# Altium PCB MZCAT_backlight_board_old.PcbDoc
Units mm, origin at the board's own origin, x right, y up, seen from the top; angles counter-clockwise.
Board outline 35.08 x 126.7 mm, 2 copper layers (Top Layer, Bottom Layer); 74 components, 57 nets, 216 pads, 0 vias.
Unrouted connection lines stored in the file: 94.
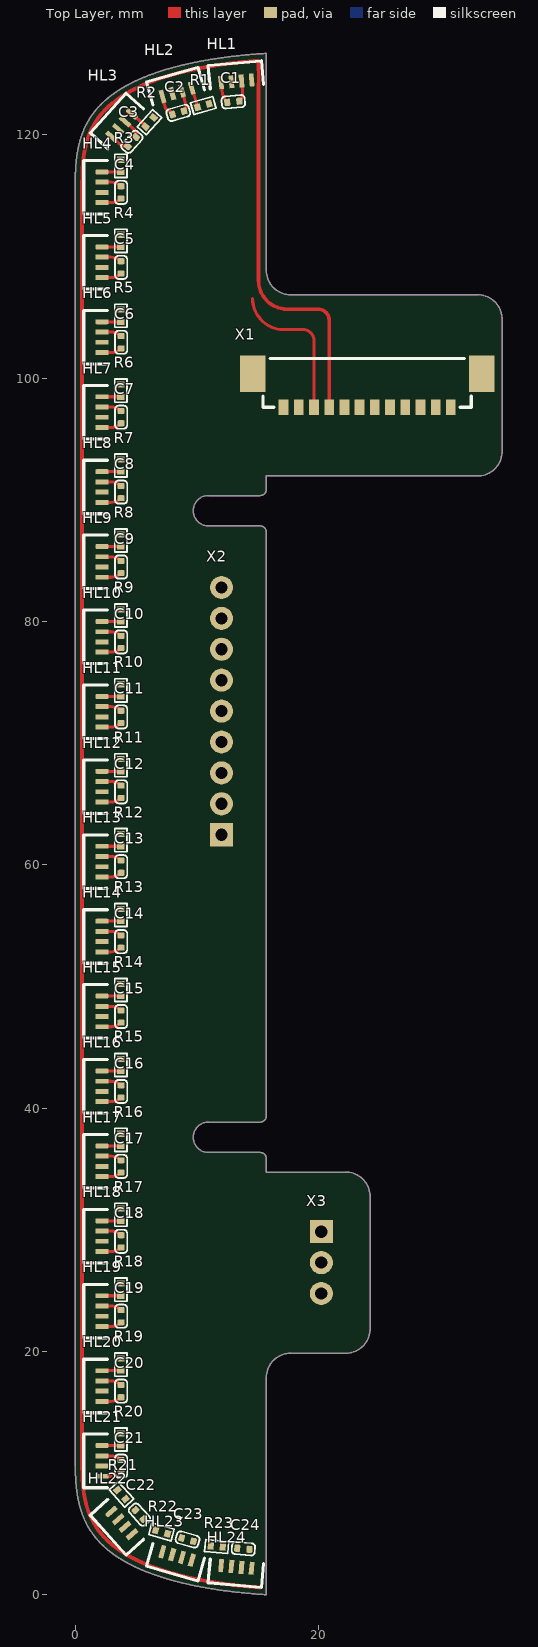
[diagram p0: Top Layer view]
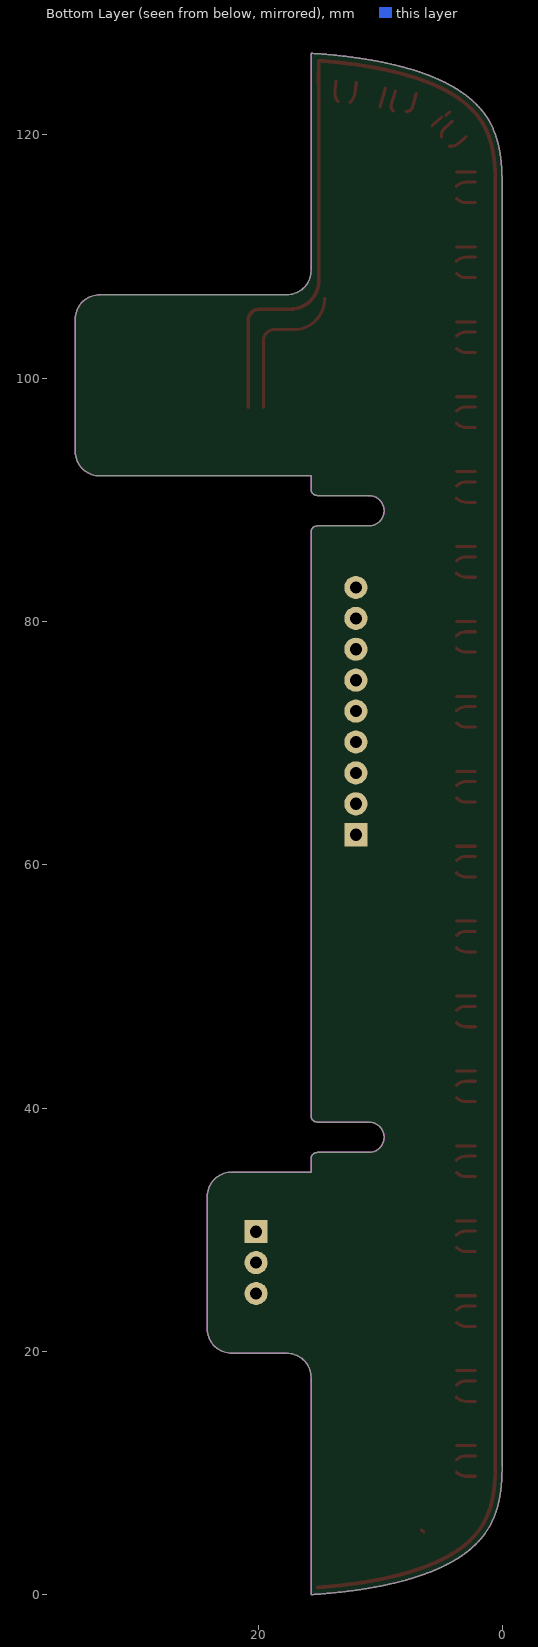
[diagram p1: Bottom Layer view, seen from below]

## Layer stack, top to bottom
Top Solder: solder mask 0.0102, Solder Resist, Dk 3.5
Top Layer: signal copper 0.0356
Dielectric 1: dielectric 0.32, FR-4, Dk 4.8
Bottom Layer: signal copper 0.0356
Bottom Solder: solder mask 0.0102, Solder Resist, Dk 3.5

## Board outline
676 vertices, not listed, extent 0.006,0.006 35.086,126.702

## Design rules (kind name [scope] priority, off if disabled: settings)
AcuteAngle min_acute_angle [OnCopper] p1: minimum=3.50000000000000E+0001 checktracksonly=FALSE // Минимальный угол между примитивами топологии
BoardOutlineClearance board_outline_clearance_std [NOT (OnLayer('Bottom Overlay') OR OnLayer('Top Overlay'))] p1: gap=0.25 ignorepadtopadclearanceinfootprint=FALSE except(0: Arc-SplitContinuation Track-SplitContinuation SMDPad-SplitContinuation THPad-SplitContinuation Via-SplitContinuation Fill-SplitContinuation Poly-SplitContinuation Region-SplitContinuation Text-SplitContinuation) // Отступ элементов топологии от края фрезеруемой печатной платы
Clearance Clearance_keepout [OnTopLayer OR OnBottomLayer vs OnLayer('Keep-Out Layer')] p1: gap=0.125 ignorepadtopadclearanceinfootprint=FALSE except(0.2: Arc-Fill Arc-Poly Track-Fill Track-Poly SMDPad-SMDPad SMDPad-Fill SMDPad-Poly THPad-Fill THPad-Poly Via-Fill Via-Poly Fill-Fill Fill-Poly Poly-Poly Poly-Region Poly-Text; 0.25: Arc-Hole Track-Hole SMDPad-Hole THPad-Hole Via-Hole Fill-Hole Poly-Hole Region-Hole Text-Hole; 0.4: Arc-Track Track-Track)
Clearance TOP_BOT_GND [InPolygonClass('TOP_BOT')] p2: gap=0.5 ignorepadtopadclearanceinfootprint=FALSE
Clearance REF_GND [InPolygonClass('REF_GND')] p3: gap=0.5 ignorepadtopadclearanceinfootprint=FALSE
Clearance clearance_outer_18um_std [OnTopLayer OR OnBottomLayer] p4: gap=0.125 ignorepadtopadclearanceinfootprint=FALSE except(0.2: Arc-Fill Arc-Poly Track-Fill Track-Poly SMDPad-Fill SMDPad-Poly THPad-Fill THPad-Poly Via-Fill Via-Poly Fill-Fill Fill-Poly Poly-Poly Poly-Region Poly-Text; 0.25: Arc-Hole Track-Hole THPad-Hole Via-Hole Fill-Hole Poly-Hole Region-Hole Text-Hole) // Зазоры на внешних слоях
Clearance clearance_inner_18um_std [NOT (OnTopLayer Or OnBottomLayer)] p5: gap=0.125 ignorepadtopadclearanceinfootprint=FALSE except(0.2: Arc-Fill Arc-Poly Track-Fill Track-Poly SMDPad-SMDPad SMDPad-Fill SMDPad-Poly THPad-Fill THPad-Poly Via-Fill Via-Poly Fill-Fill Fill-Poly Poly-Poly Poly-Region Poly-Text; 0.25: Arc-Hole Track-Hole SMDPad-Hole THPad-Hole Via-Hole Fill-Hole Poly-Hole Region-Hole Text-Hole) // Зазоры на внутренних слоях
ComponentClearance [All] p1: gap=0 collisioncheckmode=3 verticalgap=0 showdistances=FALSE
DiffPairsRouting "Schematic Differential Pairs Routing" [InNetClass('EHTERNET')] p1: maxlimit=0.3 minlimit=0.3 mostfreqgap=0.3 toplayer_minwidth=0.173 toplayer_maxwidth=0.173 toplayer_prefwidth=0.173 bottomlayer_minwidth=0.173 bottomlayer_maxwidth=0.173 bottomlayer_prefwidth=0.173 impedanceprofiledriven=TRUE impedanceprofileid={FFC83A3E-07CF-4B17-BD82-38FFC45B4F6C} maxuncoupledlength=12.7
DiffPairsRouting "Schematic Differential Pairs Routing_5" [InNetClass('MIPI_CSI_0')] p2: maxlimit=0.3 minlimit=0.3 mostfreqgap=0.3 toplayer_minwidth=0.173 toplayer_maxwidth=0.173 toplayer_prefwidth=0.173 bottomlayer_minwidth=0.173 bottomlayer_maxwidth=0.173 bottomlayer_prefwidth=0.173 impedanceprofiledriven=TRUE impedanceprofileid={FFC83A3E-07CF-4B17-BD82-38FFC45B4F6C} maxuncoupledlength=12.7
DiffPairsRouting "Schematic Differential Pairs Routing_4" [InNetClass('MIPI_CSI_1')] p3: maxlimit=0.3 minlimit=0.3 mostfreqgap=0.3 toplayer_minwidth=0.173 toplayer_maxwidth=0.173 toplayer_prefwidth=0.173 bottomlayer_minwidth=0.173 bottomlayer_maxwidth=0.173 bottomlayer_prefwidth=0.173 impedanceprofiledriven=TRUE impedanceprofileid={FFC83A3E-07CF-4B17-BD82-38FFC45B4F6C} maxuncoupledlength=12.7
DiffPairsRouting diff_pairs_routing [All] p4: maxlimit=0.127 minlimit=0.127 mostfreqgap=0.127 toplayer_minwidth=0.143 toplayer_maxwidth=0.143 toplayer_prefwidth=0.143 bottomlayer_minwidth=0.143 bottomlayer_maxwidth=0.143 bottomlayer_prefwidth=0.143 impedanceprofiledriven=TRUE maxuncoupledlength=12.7 // Правила трассировки дифференциальных пар
HoleSize min_hole_size_std [IsPad] p1: absolutevalues=TRUE maxlimit=5.9 minlimit=0.5 maxpercent=80.000 minpercent=20.000 // Диаметр межслойного переходного отверстия
HoleSize min_hole_size_via_std [IsVia] p2: absolutevalues=TRUE maxlimit=5.9 minlimit=0.3 maxpercent=80.000 minpercent=20.000 // Минимальный диаметр монтажного отверстия
HoleToHoleClearance hole_to_hole_clearance_std [All] p1: gap=0.2 allowstackedmicrovias=FALSE // Минимальное расстояние между краями двух отверстий
Length "Schematic Length Constraint" [InNetClass('EHTERNET')] p1: maxlimit=150 minlimit=0
Length "Schematic Length Constraint_5" [InNetClass('MIPI_CSI_0')] p2: maxlimit=150 minlimit=0
Length "Schematic Length Constraint_4" [InNetClass('MIPI_CSI_1')] p3: maxlimit=150 minlimit=0
MatchedLengths "Schematic Matched Net Lengths_1" [InNetClass('EHTERNET')] p1: tolerance=50 checknetsindiffpair=FALSE checkdiffpairvsdiffpair=TRUE checkxsignals=TRUE checkothers=TRUE
MatchedLengths "Schematic Matched Net Lengths" [InNetClass('EHTERNET')] p2: tolerance=0.15 checknetsindiffpair=TRUE checkdiffpairvsdiffpair=FALSE checkxsignals=FALSE checkothers=FALSE
MatchedLengths "Schematic Matched Net Lengths_11" [InNetClass('MIPI_CSI_0')] p3: tolerance=1.5 checknetsindiffpair=FALSE checkdiffpairvsdiffpair=TRUE checkxsignals=TRUE checkothers=TRUE
MatchedLengths "Schematic Matched Net Lengths_10" [InNetClass('MIPI_CSI_1')] p4: tolerance=1.5 checknetsindiffpair=FALSE checkdiffpairvsdiffpair=TRUE checkxsignals=TRUE checkothers=TRUE
MatchedLengths "Schematic Matched Net Lengths_9" [InNetClass('MIPI_CSI_1')] p5: tolerance=0.15 checknetsindiffpair=TRUE checkdiffpairvsdiffpair=FALSE checkxsignals=FALSE checkothers=FALSE
MatchedLengths "Schematic Matched Net Lengths_8" [InNetClass('MIPI_CSI_0')] p6: tolerance=0.15 checknetsindiffpair=TRUE checkdiffpairvsdiffpair=FALSE checkxsignals=FALSE checkothers=FALSE
MinimumAnnularRing min_via_ar_std [All] p1: minimumring=0.15 // Поясок площадки переходного отверстия (Annular ring VIA)
MinimumAnnularRing min_pad_ar_std [All] p2: minimumring=0.2 // Поясок монтажной контактной площадки (Annular ring PAD)
MinimumSolderMaskSliver min_solder_mask_bridge_std [All] p1: minsoldermaskwidth=0 // Мнимальная ширина масочного мостика
PlaneClearance plane_clearance_18um_std [All] p1: clearance=0.2 // Отступ полигона (для слоя plane) от элементов топологии
PlaneConnect [All] p1: planeconnectstyle=Relief reliefexpansion=0.5 reliefentries=4 reliefconductorwidth=0.2 reliefairgap=0.2
PolygonConnect poly_connect_to_pad<=0.3 [(AsMM(PadXSize_AllLayers)<=0.301) or (AsMM(PadYSize_AllLayers)<=0.301)] p1: thpad.connectstyle=Relief thpad.reliefconductorwidth=0.2 thpad.reliefentries=4 thpad.polygonreliefangle="90 Angle" thpad.airgapwidth=0.2 smdpad.connectstyle=Relief smdpad.reliefconductorwidth=0.2 smdpad.reliefentries=4 smdpad.polygonreliefangle="90 Angle" smdpad.airgapwidth=0.2 via.connectstyle=Direct via.reliefconductorwidth=0.254 via.reliefentries=4 via.polygonreliefangle="90 Angle" via.airgapwidth=0.254 // Правила подключения полигонов для падов от 0,3мм и меньше
PolygonConnect poly_connect_to_pad<=0.4 [(AsMM(PadXSize_AllLayers)<=0.401) or (AsMM(PadYSize_AllLayers)<=0.401)] p2: thpad.connectstyle=Relief thpad.reliefconductorwidth=0.26 thpad.reliefentries=4 thpad.polygonreliefangle="90 Angle" thpad.airgapwidth=0.2 smdpad.connectstyle=Relief smdpad.reliefconductorwidth=0.26 smdpad.reliefentries=4 smdpad.polygonreliefangle="90 Angle" smdpad.airgapwidth=0.2 via.connectstyle=Direct via.reliefconductorwidth=0.254 via.reliefentries=4 via.polygonreliefangle="90 Angle" via.airgapwidth=0.254 // Правила подключения полигонов для падов от 0,4 и меньше
PolygonConnect poly_connect_to_pad<=0.6 [(AsMM(PadXSize_AllLayers)<=0.601) or (AsMM(PadYSize_AllLayers)<=0.601)] p3: thpad.connectstyle=Relief thpad.reliefconductorwidth=0.33 thpad.reliefentries=4 thpad.polygonreliefangle="90 Angle" thpad.airgapwidth=0.2 smdpad.connectstyle=Relief smdpad.reliefconductorwidth=0.33 smdpad.reliefentries=4 smdpad.polygonreliefangle="90 Angle" smdpad.airgapwidth=0.2 via.connectstyle=Direct via.reliefconductorwidth=0.254 via.reliefentries=4 via.polygonreliefangle="90 Angle" via.airgapwidth=0.254 // Правила подключения полигонов для падов от 0,6мм и меньше
PolygonConnect poly_connect_to_pad<=0.7 [(AsMM(PadXSize_AllLayers)<=0.701) or (AsMM(PadYSize_AllLayers)<=0.701)] p4: thpad.connectstyle=Relief thpad.reliefconductorwidth=0.46 thpad.reliefentries=4 thpad.polygonreliefangle="90 Angle" thpad.airgapwidth=0.2 smdpad.connectstyle=Relief smdpad.reliefconductorwidth=0.46 smdpad.reliefentries=4 smdpad.polygonreliefangle="90 Angle" smdpad.airgapwidth=0.2 via.connectstyle=Direct via.reliefconductorwidth=0.254 via.reliefentries=4 via.polygonreliefangle="90 Angle" via.airgapwidth=0.254 // Правила подключения полигонов для падов от 0,7мм и меньше
PolygonConnect poly_connect_to_pad<=0.8 [(AsMM(PadXSize_AllLayers)<=0.8)or(AsMM(PadYSize_AllLayers)<=0.8)] p5: thpad.connectstyle=Relief thpad.reliefconductorwidth=0.53 thpad.reliefentries=4 thpad.polygonreliefangle="90 Angle" thpad.airgapwidth=0.3 smdpad.connectstyle=Relief smdpad.reliefconductorwidth=0.53 smdpad.reliefentries=4 smdpad.polygonreliefangle="90 Angle" smdpad.airgapwidth=0.2 via.connectstyle=Direct via.reliefconductorwidth=0.254 via.reliefentries=4 via.polygonreliefangle="90 Angle" via.airgapwidth=0.254 // Правила подключения полигонов для падов от 0,8мм и меньше
PolygonConnect poly_connect_to_pad<=1 [(AsMM(PadXSize_AllLayers)<=1.01)or(AsMM(PadYSize_AllLayers)<=1.01)] p6: thpad.connectstyle=Relief thpad.reliefconductorwidth=0.6 thpad.reliefentries=4 thpad.polygonreliefangle="90 Angle" thpad.airgapwidth=0.3 smdpad.connectstyle=Relief smdpad.reliefconductorwidth=0.6 smdpad.reliefentries=4 smdpad.polygonreliefangle="90 Angle" smdpad.airgapwidth=0.2 via.connectstyle=Direct via.reliefconductorwidth=0.254 via.reliefentries=4 via.polygonreliefangle="90 Angle" via.airgapwidth=0.254 // Правила подключения полигонов для падов от 1мм и меньше
PolygonConnect poly_connect_to_pad<=1.3 [(AsMM(PadXSize_AllLayers)<=1.31)or(AsMM(PadYSize_AllLayers)<=1.31)] p7: thpad.connectstyle=Relief thpad.reliefconductorwidth=0.66 thpad.reliefentries=4 thpad.polygonreliefangle="90 Angle" thpad.airgapwidth=0.3 smdpad.connectstyle=Relief smdpad.reliefconductorwidth=0.86 smdpad.reliefentries=4 smdpad.polygonreliefangle="90 Angle" smdpad.airgapwidth=0.2 via.connectstyle=Direct via.reliefconductorwidth=0.254 via.reliefentries=4 via.polygonreliefangle="90 Angle" via.airgapwidth=0.254 // Правила подключения полигонов для падов от 1,3мм и меньше
PolygonConnect poly_connect_to_pad<=1.6 [(AsMM(PadXSize_AllLayers)<=1.61)or(AsMM(PadYSize_AllLayers)<=1.61)] p8: thpad.connectstyle=Relief thpad.reliefconductorwidth=0.8 thpad.reliefentries=4 thpad.polygonreliefangle="90 Angle" thpad.airgapwidth=0.3 smdpad.connectstyle=Relief smdpad.reliefconductorwidth=1 smdpad.reliefentries=4 smdpad.polygonreliefangle="90 Angle" smdpad.airgapwidth=0.2 via.connectstyle=Direct via.reliefconductorwidth=0.254 via.reliefentries=4 via.polygonreliefangle="90 Angle" via.airgapwidth=0.254 // Правила подключения полигонов для падов от 1,6мм и меньше
PolygonConnect poly_connect_to_pad<=1.8 [(AsMM(PadXSize_AllLayers)<=1.8)or(AsMM(PadYSize_AllLayers)<=1.8)] p9: thpad.connectstyle=Relief thpad.reliefconductorwidth=1 thpad.reliefentries=4 thpad.polygonreliefangle="90 Angle" thpad.airgapwidth=0.3 smdpad.connectstyle=Relief smdpad.reliefconductorwidth=1.2 smdpad.reliefentries=4 smdpad.polygonreliefangle="90 Angle" smdpad.airgapwidth=0.2 via.connectstyle=Direct via.reliefconductorwidth=0.254 via.reliefentries=4 via.polygonreliefangle="90 Angle" via.airgapwidth=0.254 // Правила подключения полигонов для падов от 1,8мм и меньше
PolygonConnect poly_connect_to_pad<=2 [(AsMM(PadXSize_AllLayers)<=2.01)or(AsMM(PadYSize_AllLayers)<=2.01)] p10: thpad.connectstyle=Relief thpad.reliefconductorwidth=1.1 thpad.reliefentries=4 thpad.polygonreliefangle="90 Angle" thpad.airgapwidth=0.3 smdpad.connectstyle=Relief smdpad.reliefconductorwidth=1.4 smdpad.reliefentries=4 smdpad.polygonreliefangle="90 Angle" smdpad.airgapwidth=0.2 via.connectstyle=Direct via.reliefconductorwidth=0.254 via.reliefentries=4 via.polygonreliefangle="90 Angle" via.airgapwidth=0.254 // Правила подключения полигонов для падов от 2мм и меньше
PolygonConnect poly_connect_to_pad<=2.3 [(AsMM(PadXSize_AllLayers)<=2.31)or(AsMM(PadYSize_AllLayers)<=2.31)] p11: thpad.connectstyle=Relief thpad.reliefconductorwidth=1.2 thpad.reliefentries=4 thpad.polygonreliefangle="90 Angle" thpad.airgapwidth=0.3 smdpad.connectstyle=Relief smdpad.reliefconductorwidth=1.4 smdpad.reliefentries=4 smdpad.polygonreliefangle="90 Angle" smdpad.airgapwidth=0.2 via.connectstyle=Direct via.reliefconductorwidth=0.254 via.reliefentries=4 via.polygonreliefangle="90 Angle" via.airgapwidth=0.254 // Правила подключения полигонов для падов от 2,3мм и меньше
PolygonConnect poly_connect_to_pad<=2.5 [(AsMM(PadXSize_AllLayers)<=2.51)or(AsMM(PadYSize_AllLayers)<=2.51)] p12: thpad.connectstyle=Relief thpad.reliefconductorwidth=1.2 thpad.reliefentries=4 thpad.polygonreliefangle="90 Angle" thpad.airgapwidth=0.3 smdpad.connectstyle=Relief smdpad.reliefconductorwidth=1.4 smdpad.reliefentries=4 smdpad.polygonreliefangle="90 Angle" smdpad.airgapwidth=0.2 via.connectstyle=Direct via.reliefconductorwidth=0.254 via.reliefentries=4 via.polygonreliefangle="90 Angle" via.airgapwidth=0.254 // Правила подключения полигонов для падов от 2,5мм и меньше
PolygonConnect poly_connect_to_pad<=2.7 [(AsMM(PadXSize_AllLayers)<=2.71)or(AsMM(PadYSize_AllLayers)<=2.71)] p13: thpad.connectstyle=Relief thpad.reliefconductorwidth=1.4 thpad.reliefentries=4 thpad.polygonreliefangle="90 Angle" thpad.airgapwidth=0.3 smdpad.connectstyle=Relief smdpad.reliefconductorwidth=1.6 smdpad.reliefentries=4 smdpad.polygonreliefangle="90 Angle" smdpad.airgapwidth=0.2 via.connectstyle=Direct via.reliefconductorwidth=0.254 via.reliefentries=4 via.polygonreliefangle="90 Angle" via.airgapwidth=0.254 // Правила подключения полигонов для падов от 2,7мм и меньше
PolygonConnect poly_connect_to_pad<=3 [(AsMM(PadXSize_AllLayers)<=3.01)or(AsMM(PadYSize_AllLayers)<=3.01)] p14: thpad.connectstyle=Relief thpad.reliefconductorwidth=1.6 thpad.reliefentries=4 thpad.polygonreliefangle="90 Angle" thpad.airgapwidth=0.3 smdpad.connectstyle=Relief smdpad.reliefconductorwidth=1.8 smdpad.reliefentries=4 smdpad.polygonreliefangle="90 Angle" smdpad.airgapwidth=0.2 via.connectstyle=Direct via.reliefconductorwidth=0.254 via.reliefentries=4 via.polygonreliefangle="90 Angle" via.airgapwidth=0.254 // Правила подключения полигонов для падов от 3мм и меньше
PolygonConnect poly_connect_to_pad<=7 [(AsMM(PadXSize_AllLayers)<7.01)or(AsMM(PadYSize_AllLayers)<=7.01)] p15: thpad.connectstyle=Relief thpad.reliefconductorwidth=2 thpad.reliefentries=4 thpad.polygonreliefangle="90 Angle" thpad.airgapwidth=0.4 smdpad.connectstyle=Relief smdpad.reliefconductorwidth=2 smdpad.reliefentries=4 smdpad.polygonreliefangle="90 Angle" smdpad.airgapwidth=0.3 via.connectstyle=Direct via.reliefconductorwidth=0.254 via.reliefentries=4 via.polygonreliefangle="90 Angle" via.airgapwidth=0.254 // Правила подключения полигонов для падов от 7мм и меньше
PolygonConnect poly_connect_to_pad [All] p16: thpad.connectstyle=Relief thpad.reliefconductorwidth=0.25 thpad.reliefentries=4 thpad.polygonreliefangle="90 Angle" thpad.airgapwidth=0.2 smdpad.connectstyle=Relief smdpad.reliefconductorwidth=0.25 smdpad.reliefentries=4 smdpad.polygonreliefangle="90 Angle" smdpad.airgapwidth=0.2 via.connectstyle=Direct via.reliefconductorwidth=0.25 via.reliefentries=4 via.polygonreliefangle="90 Angle" via.airgapwidth=0.2 // Правила подключения полигонов общие
RoutingCorners [All] p1 off: cornerstyle=45-Degree minsetback=2.5 maxsetback=2.5
RoutingVias [All] p1: holewidth=0.3 width=0.6 viastyle="Through Hole" minholewidth=0.3 minwidth=0.6 maxholewidth=5.9 maxwidth=6.4
SilkToSilkClearance silk_to_silk_clearance_std [All] p1 off: silktosilkclearance=0.15 // Отступ текста шелкографии от других примитивов шелкографии
SilkToSolderMaskClearance silk_to_solder_mask_clearance_std [IsPad] p1 off: minsilkscreentomaskgap=0.15 clearancetoexposedcopper=FALSE // Минимальное расстояние между элементами шелкографии и вскрытой медью
SolderMaskExpansion solder_mask_expansion_std [All] p1: expansion=0.05 istentingtop=FALSE // Припуск паяльной масски
UnRoutedNet [All] p1: checkbadconnections=TRUE
Width width_18um_std [All] p1: maxlimit=10 minlimit=0.125 preferedwidth=0.15 checkconnectedcopper=TRUE // Ширина проводников (общая)
19 further rules are at their usual default settings.

## Classes and differential pairs
component class MZCAT_backlight_board: HL HL1 HL3 HL5 HL6 HL7 HL9 HL11 HL13 HL15 HL17 HL21 HL23 R1 R2 R3 R4 R5 R6 R7 R8 R9 R10 R11 R12 R13 R14 R15 R16 R17 R18 R19 R20 R21 R22 R23 X1 X2 X3 С1 С2 С3 С4 С5 С6 С7 С8 С9 С10 С11 С12 С13 С14 С15 С16 С17 С18 С19 С20 С21 С22 С23 С24

## Components (designator, comment, footprint, x,y, rotation, side; value= is the part's Value field where it differs from the comment)
HL1 "WS2812B" "ws2812b 4020" 13.25,124.4 r275 top
HL2 "WS2812B" "ws2812b 4020" 8.375,123.5 r286 top
HL3 "WS2812B" "ws2812b 4020" 3.819,120.788 r318 top
HL4 "WS2812B" "ws2812b 4020" 2.2,115.692 r0 top
HL5 "WS2812B" "ws2812b 4020" 2.2,109.528 r0 top
HL6 "WS2812B" "ws2812b 4020" 2.2,103.37 r0 top
HL7 "WS2812B" "ws2812b 4020" 2.2,97.212 r0 top
HL8 "WS2812B" "ws2812b 4020" 2.2,91.054 r0 top
HL9 "WS2812B" "ws2812b 4020" 2.2,84.896 r0 top
HL10 "WS2812B" "ws2812b 4020" 2.2,78.738 r0 top
HL11 "WS2812B" "ws2812b 4020" 2.2,72.58 r0 top
HL12 "WS2812B" "ws2812b 4020" 2.2,66.422 r0 top
HL13 "WS2812B" "ws2812b 4020" 2.2,60.264 r0 top
HL14 "WS2812B" "ws2812b 4020" 2.2,54.106 r0 top
HL15 "WS2812B" "ws2812b 4020" 2.2,47.948 r0 top
HL16 "WS2812B" "ws2812b 4020" 2.2,41.79 r0 top
HL17 "WS2812B" "ws2812b 4020" 2.2,35.632 r0 top
HL18 "WS2812B" "ws2812b 4020" 2.2,29.474 r0 top
HL19 "WS2812B" "ws2812b 4020" 2.2,23.316 r0 top
HL20 "WS2812B" "ws2812b 4020" 2.2,17.158 r0 top
HL21 "WS2812B" "ws2812b 4020" 2.2,11 r0 top
HL22 "WS2812B" "ws2812b 4020" 3.819,5.904 r42 top
HL23 "WS2812B" "ws2812b 4020" 8.375,3.192 r74 top
HL24 "WS2812B" "ws2812b 4020" 13.25,2.292 r85 top
R1 "100" R0402 10.531,122.413 r16 top
R2 "100" R0402 6.109,121.041 r48 top
R3 "100" R0402 3.75,117.452 r90 top
R4 "100" R0402 3.75,111.288 r90 top
R5 "100" R0402 3.75,105.13 r90 top
R6 "100" R0402 3.75,98.972 r90 top
R7 "100" R0402 3.75,92.814 r90 top
R8 "100" R0402 3.75,86.656 r90 top
R9 "100" R0402 3.75,80.498 r90 top
R10 "100" R0402 3.75,74.34 r90 top
R11 "100" R0402 3.75,68.182 r90 top
R12 "100" R0402 3.75,62.024 r90 top
R13 "100" R0402 3.75,55.866 r90 top
R14 "100" R0402 3.75,49.708 r90 top
R15 "100" R0402 3.75,43.55 r90 top
R16 "100" R0402 3.75,37.392 r90 top
R17 "100" R0402 3.75,31.234 r90 top
R18 "100" R0402 3.75,25.076 r90 top
R19 "100" R0402 3.75,18.918 r90 top
R20 "100" R0402 3.75,12.76 r90 top
R21 "100" R0402 3.8,8.25 r132 top
R22 "100" R0402 7.094,5.163 r164 top
R23 "100" R0402 11.627,3.969 r175 top
X1 "PicoBlade-12" "PicoBlade-12 SMD" 24,97.611 r180 top
X2 "PLS 1 x 9" "PLS_1x9 - emty" 12.025,62.475 r180 top
X3 "PLS 1 x 3" "PLS_1x3 - emty" 20.228,24.765 r180 top
С1 "0,1мк" C0402 12.498,122.695 r5 top
С2 "0,1мк" C0402 7.983,121.694 r16 top
С3 "0,1мк" C0402 4.304,119.076 r48 top
С4 "0,1мк" C0402 3.75,114.772 r90 top
С5 "0,1мк" C0402 3.75,108.608 r90 top
С6 "0,1мк" C0402 3.75,102.45 r90 top
С7 "0,1мк" C0402 3.75,96.292 r90 top
С8 "0,1мк" C0402 3.75,90.134 r90 top
С9 "0,1мк" C0402 3.75,83.976 r90 top
С10 "0,1мк" C0402 3.75,77.818 r90 top
С11 "0,1мк" C0402 3.75,71.66 r90 top
С12 "0,1мк" C0402 3.75,65.502 r90 top
С13 "0,1мк" C0402 3.75,59.344 r90 top
С14 "0,1мк" C0402 3.75,53.186 r90 top
С15 "0,1мк" C0402 3.75,47.028 r90 top
С16 "0,1мк" C0402 3.75,40.87 r90 top
С17 "0,1мк" C0402 3.75,34.712 r90 top
С18 "0,1мк" C0402 3.75,28.554 r90 top
С19 "0,1мк" C0402 3.75,22.396 r90 top
С20 "0,1мк" C0402 3.75,16.238 r90 top
С21 "0,1мк" C0402 3.75,10.08 r90 top
С22 "0,1мк" C0402 5.6,6.2 r132 top
С23 "0,1мк" C0402 9.706,4.38 r164 top
С24 "0,1мк" C0402 14.319,3.718 r175 top

## Footprints (in the part's own frame and the unit in brackets; to place one, negate y for a bottom-side part, rotate by r counter-clockwise, add the part's x,y. Pads: shape width x height; smd on the part's side, far side on the other; paste and mask are expansions set on the pad)
C0402 [mm]
  rrect50% 0.5x0.6 smd: 1(0,-0.02) 2(1,-0.02)
  silkscreen extent -0.45,-0.53 1.45,0.48, body extent 0,-0.28 1,0.22, height 0.5
"PicoBlade-12 SMD" [mm]
  rect 2.1x3 smd: 0(-9.425,-2.75) 0(9.425,-2.75)
  rect 0.8x1.3 smd: 1(6.875,0) 2(5.625,0) 3(4.375,0) 4(3.125,0) 5(1.875,0) 6(0.625,0) 7(-0.625,0) 8(-1.875,0) 9(-3.125,0) 10(-4.375,0) 11(-5.625,0) 12(-6.875,0)
  silkscreen extent -8.55,-4 8.55,0, body extent -10.07,-3.85 10.07,0.35, height 4.72
"PLS_1x3 - emty" [mm]
  round 1.9 hole 1: 1(0,0) 2(0,-2.54)
  rect 1.9x1.9 hole 1: 3(0,-5.08)
"PLS_1x9 - emty" [mm]
  rect 1.9x1.9 hole 1: 1(0,0)
  round 1.9 hole 1: 2(0,-2.54) 3(0,-5.08) 4(0,-7.62) 5(0,-10.16) 6(0,-12.7) 7(0,-15.24) 8(0,-17.78) 9(0,-20.32)
R0402 [mm]
  rect 0.5x0.6 smd: 1(-0.5,0) 2(0.5,0)
  silkscreen extent -0.95,-0.5 0.95,0.5, body extent -0.5,-0.23 0.5,0.28, height 0.36
"ws2812b 4020" [mm] "ws2812b led in 4020 case"
  rrect50% 1.09x0.4 smd: 1(0,1.26)
  rect 1.09x0.4 smd: 2(0,0.42) 3(0,-0.42) 4(0,-1.26)
  silkscreen extent -1.5,-2.2 0.45,2.2, body extent -1.3,-2 0.45,2, height 2

## Part data
HL1 HL2 HL3 HL4 HL5 HL6 HL7 HL8 HL9 HL10 HL11 HL12 HL13 HL14 HL15 HL16 HL17 HL18 HL19 HL20 HL21 HL22 HL23 HL24: "адресный светодиод на микросхеме WS2812b", Name=WS2812B
R1 R2 R3 R4 R5 R6 R7 R8 R9 R10 R11 R12 R13 R14 R15 R16 R17 R18 R19 R20 R21 R22 R23: library part "Резистор 0.05Вт", "Резистор 0,05Вт"
X1: library part Header_12, "Разъем - 12 конт. мама", Contact_1=+7,2В, Contact_2=SERVO_DATA, Contact_3=LED_DATA, Contact_4=+5В, Contact_5=DN, Contact_6=DP, Contact_7=SSRXN, Contact_8=SSRXP, Contact_9=SSTXN, Contact_10=SSTXP, Contact_11=GND, Contact_12=GND, Contact_13=TP, Name=PicoBlade-12
С1 С2 С3 С4 С5 С6 С7 С8 С9 С10 С11 С12 С13 С14 С15 С16 С17 С18 С19 С20 С21 С22 С23 С24: library part "Кер. конденсатор"
X2: Contact_1=+5В, Contact_2=DN, Contact_3=DP, Contact_4=GND, Contact_5=SSRXN, Contact_6=SSRXP, Contact_7=GND, Contact_8=SSTXN, Contact_9=SSTXP, Name="PLS 1 x 9"
X3: Contact_1=VDD, Contact_2=GND, Contact_3=DATA, Name="PLS 1 x 3"

## Nets (pads, with @x,y where several pads share a name; then routed paths per layer and width w, separated by ;. In a path a pad name is that pad's centre, name@x,y a point inside that pad or via, vN(x,y) a via of type N, cw(c..) or ccw(c..) an arc to the next point about the centre after c; other vN are vias at no path point)
+5В: HL1.2 HL2.2 HL3.2 HL4.2 HL5.2 HL6.2 HL7.2 HL8.2 HL9.2 HL10.2 HL11.2 HL12.2 HL13.2 HL14.2 HL15.2 HL16.2 HL17.2 HL18.2 HL19.2 HL20.2 HL21.2 HL22.2 HL23.2 HL24.2 X1.4 X2.1 С1.2 С2.2 С3.2 С4.2 С5.2 С6.2 С7.2 С8.2 С9.2 С10.2 С11.2 С12.2 С13.2 С14.2 С15.2 С16.2 С17.2 С18.2 С19.2 С20.2 С21.2 С22.2 С23.2 С24.2 | length 213.7
  Top Layer w0.254: HL21.2 2.949,11.42 cw(c2.949,10.259) С21.2 ; HL20.2 2.949,17.578 cw(c2.949,16.418) С20.2 ; HL19.2 2.949,23.736 cw(c2.949,22.576) С19.2 ; HL18.2 2.949,29.894 cw(c2.949,28.734) С18.2 ; HL17.2 2.949,36.052 cw(c2.949,34.892) С17.2 ; HL16.2 2.949,42.21 cw(c2.949,41.05) С16.2 ; HL15.2 2.949,48.368 cw(c2.949,47.208) С15.2 ; HL14.2 2.949,54.526 cw(c2.949,53.366) С14.2 ; HL13.2 2.949,60.684 cw(c2.949,59.524) С13.2 ; HL12.2 2.949,66.842 cw(c2.949,65.682) С12.2 ; HL11.2 2.949,73 cw(c2.949,71.84) С11.2 ; HL10.2 2.949,79.158 cw(c2.949,77.998) С10.2 ; HL9.2 2.949,85.316 cw(c2.949,84.156) С9.2 ; HL8.2 2.949,91.474 cw(c2.949,90.314) С8.2 ; HL7.2 2.949,97.632 cw(c2.949,96.472) С7.2 ; HL6.2 2.949,103.79 cw(c2.949,102.63) С6.2 ; HL5.2 2.949,109.948 cw(c2.949,108.788) С5.2 ; HL4.2 2.949,116.112 cw(c2.949,114.951) С4.2 ; HL3.2 4.418,120.829 4.765,120.517 cw(c4.595,120.328) 4.777,120.505 cw(c4.24,119.984) 4.988,119.984 С3.2 ; HL2.2 8.894,123.214 9.122,122.419 cw(c8.878,122.349) 9.131,122.328 cw(c8.545,122.376) 9.045,122.066 С2.2 ; С1.2 ccw(c12.883,123.375) 13.75,123.375 13.75,123.612 ccw(c13.496,123.612) 13.749,123.634 13.715,124.021 HL1.2
  Top Layer w0.3: 0.575,9.888 ccw(c0.875,9.888) 0.575,9.878 0.576,9.855 0.577,9.82 0.579,9.786 ; 0.625,117.612 cw(c0.925,117.612) 0.626,117.64 0.627,117.649 ; 0.775,118.704 0.767,118.66 0.759,118.616 0.752,118.579 0.745,118.541 0.739,118.504 0.732,118.466 0.726,118.429 0.72,118.391 0.714,118.353 0.708,118.315 0.702,118.276 0.697,118.238 0.691,118.199 0.686,118.16 0.681,118.123 ccw(c0.978,118.081) 0.68,118.121 0.675,118.082 0.67,118.043 0.665,118.003 0.66,117.963 0.656,117.924 0.651,117.884 0.648,117.852 0.644,117.819 0.641,117.787 0.637,117.755 0.634,117.722 0.631,117.69 0.627,117.649 ; 0.775,118.705 0.784,118.747 cw(c1.078,118.689) 0.784,118.749 0.792,118.791 cw(c1.087,118.731) 0.793,118.794 ; 0.793,118.794 0.802,118.835 0.811,118.878 0.82,118.92 ; 0.82,118.922 0.83,118.964 0.839,119.006 0.849,119.048 ; 0.849,119.049 0.859,119.09 0.869,119.132 0.88,119.174 0.89,119.214 0.901,119.256 0.912,119.296 ; 0.912,119.297 0.923,119.338 0.934,119.378 ; 0.934,119.378 0.946,119.418 0.959,119.465 0.973,119.511 0.987,119.557 1.004,119.609 1.02,119.661 1.037,119.713 ; 1.038,119.714 1.051,119.755 cw(c1.336,119.661) 1.053,119.759 1.07,119.808 ; 1.07,119.809 1.088,119.858 cw(c1.37,119.758) 1.088,119.86 1.106,119.909 1.127,119.965 cw(c1.408,119.859) 1.128,119.966 1.148,120.02 ; 1.149,120.021 1.173,120.081 cw(c1.451,119.97) 1.173,120.083 1.2,120.148 cw(c1.477,120.034) 1.201,120.15 1.228,120.214 cw(c1.504,120.097) 1.228,120.216 1.256,120.28 cw(c1.531,120.159) 1.257,120.282 1.29,120.356 cw(c1.564,120.233) 1.291,120.359 1.331,120.444 cw(c1.603,120.317) 1.332,120.447 1.371,120.525 cw(c1.64,120.393) 1.372,120.527 1.415,120.614 cw(c6.635,117.928) 1.88,121.37 cw(c6.691,117.887) 1.958,121.475 2.018,121.554 cw(c2.255,121.37) 2.02,121.556 2.076,121.626 cw(c2.31,121.438) 2.078,121.628 ; 1.174,6.624 1.175,6.62 1.271,6.395 1.435,6.057 ccw(c1.705,6.188) 1.437,6.052 ccw(c6.633,8.78) 1.928,5.273 ccw(c6.722,8.845) 1.962,5.227 2.365,4.75 2.382,4.732 2.43,4.681 2.473,4.637 2.576,4.534 2.601,4.51 2.642,4.47 2.685,4.429 2.728,4.389 2.772,4.349 2.816,4.309 2.849,4.28 2.851,4.279 2.988,4.161 3.003,4.148 3.006,4.145 3.018,4.136 3.06,4.101 3.102,4.066 3.12,4.052 3.167,4.015 3.207,3.983 3.248,3.951 ; 1.173,6.625 1.13,6.737 1.129,6.739 cw(c1.41,6.844) 1.128,6.741 1.082,6.867 cw(c1.364,6.97) 1.08,6.872 1.037,6.996 cw(c1.321,7.093) 1.034,7.006 0.915,7.4 0.908,7.425 0.897,7.466 0.887,7.507 0.876,7.548 0.866,7.59 0.856,7.632 0.846,7.674 0.836,7.716 0.826,7.759 0.817,7.801 0.808,7.844 0.799,7.888 0.79,7.931 0.781,7.975 0.774,8.011 0.767,8.048 0.76,8.085 0.753,8.122 0.746,8.159 0.74,8.197 0.734,8.234 0.727,8.272 0.721,8.309 0.715,8.348 0.709,8.386 0.703,8.424 0.698,8.463 0.692,8.501 0.687,8.54 0.681,8.579 0.676,8.618 0.671,8.658 0.666,8.697 0.661,8.737 0.657,8.776 0.652,8.817 0.648,8.848 0.645,8.881 0.642,8.913 0.638,8.945 0.635,8.978 0.632,9.01 0.629,9.043 0.626,9.076 0.623,9.108 0.62,9.141 0.617,9.174 0.614,9.208 0.612,9.241 0.609,9.274 0.606,9.308 0.604,9.341 0.602,9.375 0.599,9.408 0.597,9.442 0.595,9.476 0.593,9.51 0.591,9.544 0.589,9.579 0.587,9.613 0.585,9.647 0.584,9.682 0.582,9.716 0.58,9.751 0.579,9.786 ; 2.078,121.629 2.14,121.704 cw(c2.371,121.513) 2.142,121.707 2.197,121.771 cw(c2.425,121.576) 2.199,121.774 2.246,121.827 cw(c2.472,121.63) 2.248,121.83 2.301,121.888 cw(c2.524,121.688) 2.303,121.891 2.353,121.945 cw(c2.573,121.742) 2.354,121.946 2.4,121.996 cw(c2.619,121.79) 2.402,121.997 2.443,122.041 cw(c2.66,121.834) 2.445,122.043 2.488,122.087 cw(c2.703,121.877) 2.49,122.088 2.528,122.127 cw(c2.741,121.916) 2.529,122.128 2.569,122.168 cw(c2.78,121.954) 2.57,122.169 2.61,122.208 cw(c2.819,121.993) 2.612,122.209 2.652,122.248 ; 2.653,122.249 2.695,122.288 cw(c2.9,122.069) 2.696,122.29 2.738,122.328 cw(c2.942,122.108) 2.74,122.33 2.782,122.368 cw(c2.984,122.146) 2.783,122.37 2.826,122.408 cw(c3.027,122.185) 2.828,122.409 2.866,122.443 cw(c3.064,122.218) 2.867,122.444 2.906,122.478 cw(c3.103,122.251) 2.907,122.479 2.946,122.512 cw(c3.142,122.285) 2.948,122.514 2.987,122.547 cw(c3.181,122.318) 2.989,122.548 ; 3.055,122.603 3.03,122.583 ccw(c3.221,122.351) 3.029,122.582 2.989,122.548 ; 3.248,3.951 3.289,3.92 3.331,3.888 3.373,3.857 3.416,3.825 3.459,3.794 ; 3.459,3.794 3.503,3.763 3.547,3.731 3.591,3.7 ; 3.592,3.7 3.637,3.669 3.682,3.638 3.728,3.607 3.775,3.576 3.78,3.572 ccw(c3.945,3.823) 3.783,3.571 3.998,3.433 4.039,3.407 4.081,3.382 4.122,3.357 4.165,3.331 4.207,3.306 4.25,3.281 4.293,3.256 4.336,3.231 4.38,3.206 4.425,3.181 4.469,3.156 4.514,3.131 4.559,3.107 4.605,3.082 4.651,3.057 4.697,3.033 4.744,3.008 4.791,2.984 4.838,2.96 4.886,2.936 4.934,2.911 4.982,2.887 5.031,2.863 5.08,2.84 5.129,2.816 5.179,2.792 5.229,2.768 5.28,2.745 5.331,2.721 5.382,2.698 5.433,2.675 5.485,2.651 5.537,2.628 5.59,2.605 5.643,2.582 5.696,2.559 5.749,2.537 5.803,2.514 5.858,2.491 5.912,2.469 5.967,2.447 6.022,2.424 6.078,2.402 6.134,2.38 6.19,2.358 6.247,2.336 6.304,2.315 6.361,2.293 6.418,2.271 6.476,2.25 ; 3.621,123.028 3.577,122.998 ccw(c3.748,122.751) 3.576,122.997 3.533,122.967 ; 3.622,123.029 3.666,123.059 cw(c3.836,122.812) 3.668,123.06 3.712,123.09 cw(c3.88,122.842) 3.713,123.091 3.759,123.121 3.805,123.152 cw(c3.97,122.902) 3.807,123.153 3.853,123.183 3.901,123.214 3.941,123.239 cw(c4.102,122.986) 3.942,123.24 3.981,123.265 cw(c4.141,123.011) 3.982,123.266 4.022,123.29 cw(c4.181,123.036) 4.023,123.291 4.063,123.316 cw(c4.221,123.06) 4.065,123.316 4.105,123.341 4.147,123.366 cw(c4.302,123.109) 4.148,123.367 4.19,123.392 4.233,123.417 4.275,123.442 cw(c4.426,123.183) 4.276,123.443 4.318,123.467 cw(c4.469,123.207) 4.32,123.468 4.363,123.492 4.406,123.517 ; 4.407,123.517 4.451,123.542 cw(c4.597,123.28) 4.452,123.542 4.495,123.567 cw(c4.641,123.304) 4.497,123.567 4.54,123.591 cw(c4.685,123.328) 4.542,123.592 4.586,123.616 cw(c4.729,123.352) 4.587,123.617 4.632,123.641 cw(c4.774,123.376) 4.633,123.641 4.676,123.664 cw(c4.819,123.4) 4.68,123.666 4.724,123.69 cw(c4.864,123.424) 4.726,123.69 4.771,123.714 cw(c4.91,123.448) 4.772,123.715 4.818,123.738 ; 4.82,123.739 4.866,123.763 cw(c5.002,123.495) 4.867,123.763 4.914,123.787 ; 4.915,123.787 4.962,123.811 ; 4.963,123.811 5.011,123.835 ; 5.012,123.835 5.06,123.859 ; 5.061,123.859 5.109,123.883 ; 5.11,123.883 5.159,123.906 ; 5.16,123.907 5.209,123.93 ; 5.21,123.931 5.259,123.954 ; 5.26,123.954 5.31,123.977 ; 5.311,123.978 5.361,124.001 5.412,124.024 ; 5.413,124.024 5.464,124.047 ; 5.465,124.048 5.516,124.07 ; 5.517,124.071 5.568,124.093 ; 5.569,124.094 5.621,124.116 ; 5.622,124.117 5.674,124.139 ; 5.675,124.14 5.727,124.162 ; 5.729,124.163 5.781,124.185 ; 5.782,124.185 5.835,124.207 ; 5.836,124.208 5.89,124.23 5.944,124.252 cw(c6.058,123.975) 5.946,124.253 6,124.275 6.055,124.297 6.111,124.319 ; 6.112,124.319 6.167,124.341 ; 6.168,124.341 6.224,124.363 ; 6.225,124.363 6.28,124.385 ; 6.281,124.385 6.338,124.406 ; 6.338,124.407 6.395,124.428 ; 6.396,124.428 6.453,124.449 ; 6.454,124.45 6.511,124.471 6.581,124.496 ; 6.477,2.25 6.546,2.224 6.617,2.199 6.676,2.178 6.735,2.157 6.795,2.136 6.855,2.115 6.915,2.095 6.975,2.074 7.036,2.054 7.098,2.034 7.159,2.013 7.221,1.993 7.283,1.973 7.346,1.954 7.408,1.934 7.471,1.914 7.535,1.895 7.598,1.876 7.662,1.856 7.727,1.837 7.791,1.818 7.856,1.8 7.921,1.781 7.987,1.762 8.052,1.744 8.118,1.726 8.198,1.704 8.278,1.682 8.358,1.661 8.439,1.639 8.52,1.618 8.602,1.597 8.684,1.577 8.766,1.556 8.835,1.539 8.904,1.522 8.974,1.506 9.043,1.489 9.127,1.469 9.212,1.45 9.296,1.431 9.381,1.412 9.467,1.393 9.538,1.377 9.61,1.361 9.682,1.346 9.754,1.331 9.826,1.316 9.899,1.301 9.986,1.283 10.074,1.266 10.162,1.248 10.25,1.231 10.339,1.214 10.428,1.197 10.517,1.181 10.607,1.164 10.697,1.148 10.787,1.132 10.877,1.116 10.968,1.101 11.059,1.085 11.151,1.07 11.242,1.055 11.334,1.04 11.426,1.025 11.518,1.011 11.611,0.997 11.704,0.983 11.797,0.969 11.89,0.955 11.984,0.942 12.077,0.928 12.171,0.915 12.266,0.902 12.36,0.89 12.455,0.877 12.55,0.865 12.645,0.853 12.74,0.841 12.835,0.829 12.931,0.817 13.027,0.806 13.139,0.793 13.251,0.78 13.363,0.768 13.476,0.755 13.588,0.743 13.701,0.731 13.798,0.722 13.896,0.712 13.993,0.702 14.106,0.691 14.22,0.681 14.334,0.67 14.448,0.66 14.562,0.65 14.66,0.642 14.758,0.634 14.856,0.626 14.955,0.618 15.053,0.61 15.15,0.603 ; 6.582,124.497 6.64,124.518 6.699,124.538 6.758,124.559 ; 6.759,124.56 6.818,124.58 6.878,124.601 ; 6.879,124.601 6.939,124.621 ; 6.94,124.622 6.999,124.642 ; 7,124.642 7.06,124.662 ; 7.061,124.663 7.122,124.682 7.183,124.703 ; 7.184,124.703 7.245,124.723 ; 7.246,124.723 7.308,124.742 ; 7.309,124.743 7.37,124.762 cw(c7.461,124.476) 7.373,124.763 7.433,124.782 ; 7.434,124.782 7.496,124.801 7.56,124.821 7.624,124.84 ; 7.624,124.84 7.688,124.859 ; 7.689,124.859 7.752,124.878 ; 7.753,124.878 7.817,124.897 ; 7.818,124.897 7.882,124.916 ; 7.883,124.916 7.947,124.934 ; 7.948,124.935 8.013,124.953 ; 8.013,124.953 8.078,124.971 ; 8.079,124.972 8.145,124.99 ; 8.145,124.99 8.211,125.008 8.291,125.029 ; 8.292,125.03 8.371,125.051 8.452,125.072 ; 8.453,125.072 8.533,125.093 ; 8.534,125.093 8.615,125.114 ; 8.616,125.114 8.697,125.135 ; 8.698,125.135 8.766,125.152 ; 8.767,125.152 8.835,125.169 ; 8.835,125.169 8.904,125.186 ; 8.905,125.186 8.973,125.202 ; 8.974,125.202 9.043,125.219 ; 9.044,125.219 9.113,125.235 9.197,125.255 9.282,125.274 ; 9.283,125.274 9.367,125.293 ; 9.368,125.294 9.452,125.312 9.523,125.328 ; 9.524,125.328 9.595,125.343 ; 9.596,125.344 9.667,125.359 9.739,125.374 ; 9.74,125.374 9.811,125.389 ; 9.812,125.389 9.884,125.404 ; 9.885,125.404 9.957,125.419 10.044,125.437 10.132,125.454 cw(c10.191,125.16) 10.133,125.454 10.22,125.471 10.309,125.488 ; 10.31,125.489 10.398,125.505 ; 10.399,125.505 10.487,125.522 10.577,125.538 ; 10.577,125.539 10.666,125.555 10.757,125.571 10.847,125.587 10.938,125.602 ; 10.938,125.602 11.028,125.618 11.12,125.633 11.211,125.648 11.303,125.663 11.395,125.678 ; 11.396,125.678 11.487,125.692 ; 11.488,125.692 11.58,125.707 11.672,125.721 11.765,125.735 ; 11.766,125.735 11.859,125.749 cw(c11.902,125.452) 11.862,125.749 11.952,125.762 ; 11.953,125.762 12.046,125.775 12.14,125.789 12.234,125.802 12.328,125.814 ; 12.329,125.814 12.423,125.827 12.518,125.839 ; 12.518,125.839 12.613,125.851 ; 12.613,125.852 12.708,125.863 ; 12.708,125.864 12.803,125.875 12.899,125.887 ; 12.899,125.887 12.994,125.898 13.09,125.91 ; 13.091,125.91 13.202,125.923 ; 13.203,125.923 13.315,125.935 13.427,125.948 ; 13.428,125.948 13.54,125.96 ; 13.54,125.96 13.653,125.972 ; 13.653,125.972 13.75,125.982 ; 13.75,125.982 13.847,125.991 13.944,126.001 ; 13.944,126.001 14.041,126.011 14.139,126.02 14.252,126.03 ; 14.253,126.03 14.366,126.041 ; 14.367,126.041 14.48,126.051 14.578,126.059 14.676,126.068 ; 14.677,126.068 14.774,126.076 ; 14.775,126.076 14.873,126.084 ; 14.873,126.084 14.971,126.091 15.069,126.099 15.069,126.093 15.094,124.382 cw(c14.719,124.375) 15.08,124.275 ccw(c15.369,124.196) 15.069,124.197 15.069,108.015 ccw(c17.409,108.015) 17.409,105.675 19.95,105.675 cw(c19.95,104.75) 20.875,104.75 X1.4 ; 0.579,9.786 0.577,9.888 0.563,10.585 cw(c0.863,10.591) 0.563,10.591 0.563,116.127 0.563,116.154 0.563,116.182 0.563,116.209 0.563,116.237 0.563,116.264 0.563,116.291 0.564,116.318 0.564,116.346 0.564,116.373 0.565,116.4 0.565,116.427 0.565,116.454 0.566,116.481 0.566,116.508 0.567,116.534 0.567,116.561 0.568,116.588 0.569,116.615 0.569,116.641 0.57,116.668 0.571,116.695 0.572,116.721 0.572,116.747 0.573,116.774 0.574,116.8 0.575,116.827 0.576,116.853 0.577,116.888 0.579,116.923 0.58,116.957 0.582,116.992 0.584,117.026 0.585,117.061 0.587,117.095 0.589,117.13 0.591,117.164 0.593,117.198 0.595,117.232 0.597,117.266 0.599,117.3 0.602,117.333 0.604,117.367 0.606,117.401 0.609,117.434 0.612,117.467 0.614,117.501 0.617,117.531 cw(c0.916,117.509) 0.617,117.536 0.62,117.567 0.623,117.608 0.627,117.649 ; 2.989,122.548 3.032,122.581 3.46,122.91 ; 3.46,122.91 cw(c3.672,122.697) 3.464,122.913 ; 3.46,122.91 3.464,122.913 ; 3.464,122.913 cw(c3.672,122.697) 3.497,122.942 3.531,122.966 cw(c3.705,122.721) 3.533,122.967 ; 3.464,122.913 3.533,122.967
+7,2В: X1.1 X3.2
GND: HL1.4 HL2.4 HL3.4 HL4.4 HL5.4 HL6.4 HL7.4 HL8.4 HL9.4 HL10.4 HL11.4 HL12.4 HL13.4 HL14.4 HL15.4 HL16.4 HL17.4 HL18.4 HL19.4 HL20.4 HL21.4 HL22.4 HL23.4 HL24.4 X1.11 X1.12 X2.4 X2.7 X3.3 С1.1 С2.1 С3.1 С4.1 С5.1 С6.1 С7.1 С8.1 С9.1 С10.1 С11.1 С12.1 С13.1 С14.1 С15.1 С16.1 С17.1 С18.1 С19.1 С20.1 С21.1 С22.1 С23.1 С24.1 | length 35.1
  Top Layer w0.254: HL21.4 2.949,9.74 ccw(c2.949,10.901) С21.1 ; HL20.4 2.949,15.898 ccw(c2.949,17.059) С20.1 ; HL19.4 2.949,22.056 ccw(c2.949,23.217) С19.1 ; HL18.4 2.949,28.214 ccw(c2.949,29.375) С18.1 ; HL17.4 2.949,34.372 ccw(c2.949,35.533) С17.1 ; HL16.4 2.949,40.53 ccw(c2.949,41.691) С16.1 ; HL15.4 2.949,46.688 ccw(c2.949,47.849) С15.1 ; HL14.4 2.949,52.846 ccw(c2.949,54.007) С14.1 ; HL13.4 2.949,59.004 ccw(c2.949,60.165) С13.1 ; HL12.4 2.949,65.162 ccw(c2.949,66.323) С12.1 ; HL11.4 2.949,71.32 ccw(c2.949,72.481) С11.1 ; HL10.4 2.949,77.478 ccw(c2.949,78.639) С10.1 ; HL9.4 2.949,83.636 ccw(c2.949,84.797) С9.1 ; HL8.4 2.949,89.794 ccw(c2.949,90.955) С8.1 ; HL7.4 2.949,95.952 ccw(c2.949,97.113) С7.1 ; HL6.4 2.949,102.11 ccw(c2.949,103.271) С6.1 ; HL5.4 2.949,108.268 ccw(c2.949,109.429) С5.1 ; HL4.4 2.949,114.432 ccw(c2.949,115.593) С4.1 ; HL3.4 3.286,119.572 3.624,119.268 ccw(c4.225,120.023) 4.136,119.062 С3.1 ; HL2.4@7.064,123.403 7.179,123.001 7.414,122.181 ccw(c7.83,122.405) 7.745,121.941 ccw(c7.941,123.018) 7.757,121.939 С2.1@7.889,121.924 ; HL1.4 12.04,123.875 12.089,123.422 12.091,123.405 ccw(c13.591,123.766) 12.363,122.832 С1.1
LED_DATA: HL1.1 X1.3 | length 12.5
  Top Layer w0.254: 14.58,106.54 ccw(c17.12,106.54) 17.12,104 18.7,104 cw(c18.7,103.075) 19.625,103.075 X1.3
NetHL1_3: HL1.3 R1.2
NetHL2_1: HL2.1 R1.1 | length 1.6
  Top Layer w0.254: HL2.1 9.712,123.449 10.001,122.441 R1.1
NetHL2_3: HL2.3 R2.2
NetHL3_1: HL3.1 R2.1 | length 1.5
  Top Layer w0.254: HL3.1@4.293,121.886 HL3.1@4.607,121.611 ; HL3.1@4.976,121.449 5.676,120.818 R2.1@5.776,120.73
NetHL3_3: HL3.3 R3.2
NetHL4_1: HL4.1 R3.1 | length 1.5
  Top Layer w0.254: HL4.1 R3.1
NetHL4_3: HL4.3 R4.2
NetHL5_1: HL5.1 R4.1 | length 1.6
  Top Layer w0.254: HL5.1 R4.1
NetHL5_3: HL5.3 R5.2
NetHL6_1: HL6.1 R5.1 | length 1.6
  Top Layer w0.254: HL6.1 R5.1
NetHL6_3: HL6.3 R6.2
NetHL7_1: HL7.1 R6.1 | length 1.6
  Top Layer w0.254: HL7.1 R6.1
NetHL7_3: HL7.3 R7.2
NetHL8_1: HL8.1 R7.1 | length 1.6
  Top Layer w0.254: HL8.1 R7.1
NetHL8_3: HL8.3 R8.2
NetHL9_1: HL9.1 R8.1 | length 1.6
  Top Layer w0.254: HL9.1 R8.1
NetHL9_3: HL9.3 R9.2
NetHL10_1: HL10.1 R9.1 | length 1.6
  Top Layer w0.254: HL10.1 R9.1
NetHL10_3: HL10.3 R10.2
NetHL11_1: HL11.1 R10.1 | length 1.6
  Top Layer w0.254: HL11.1 R10.1
NetHL11_3: HL11.3 R11.2
NetHL12_1: HL12.1 R11.1 | length 1.6
  Top Layer w0.254: HL12.1 R11.1
NetHL12_3: HL12.3 R12.2
NetHL13_1: HL13.1 R12.1 | length 1.6
  Top Layer w0.254: HL13.1 R12.1
NetHL13_3: HL13.3 R13.2
NetHL14_1: HL14.1 R13.1 | length 1.6
  Top Layer w0.254: HL14.1 R13.1
NetHL14_3: HL14.3 R14.2
NetHL15_1: HL15.1 R14.1 | length 1.6
  Top Layer w0.254: HL15.1 R14.1
NetHL15_3: HL15.3 R15.2
NetHL16_1: HL16.1 R15.1 | length 1.6
  Top Layer w0.254: HL16.1 R15.1
NetHL16_3: HL16.3 R16.2
NetHL17_1: HL17.1 R16.1 | length 1.6
  Top Layer w0.254: HL17.1 R16.1
NetHL17_3: HL17.3 R17.2
NetHL18_1: HL18.1 R17.1 | length 1.6
  Top Layer w0.254: HL18.1 R17.1
NetHL18_3: HL18.3 R18.2
NetHL19_1: HL19.1 R18.1 | length 1.6
  Top Layer w0.254: HL19.1 R18.1
NetHL19_3: HL19.3 R19.2
NetHL20_1: HL20.1 R19.1 | length 1.6
  Top Layer w0.254: HL20.1 R19.1
NetHL20_3: HL20.3 R20.2
NetHL21_1: HL21.1 R20.1 | length 1.6
  Top Layer w0.254: HL21.1 R20.1
NetHL21_3: HL21.3 R21.2
NetHL22_1: HL22.1 R21.1
NetHL22_3: HL22.3 R22.2 | length 0.2
  Top Layer w0.254: R22.2@6.448,5.168 R22.2
NetHL23_1: HL23.1 R22.1
NetHL23_3: HL23.3 R23.2
NetHL24_1: HL24.1 R23.1
NetX1_5: X1.5 X2.2
NetX1_6: X1.6 X2.3
NetX1_7: X1.7 X2.5
NetX1_8: X1.8 X2.6
NetX1_9: X1.9 X2.8
NetX1_10: X1.10 X2.9
SERVO_DATA: X1.2 X3.1
pads on no net: HL24.3 X1.0

## Keep-outs
Keep-Out Layer:
  the board outline again, w0.013